# Altium PCB 车模底盘.PcbDoc (part 2 of 2)
Units mil, origin at the board's own origin, x right, y up, seen from the top; angles counter-clockwise.
Board outline 3926.98 x 3180.12 mil, 4 copper layers (Top Layer, GND, POWER, Bottom Layer); 159 components, 168 nets, 630 pads, 255 vias.
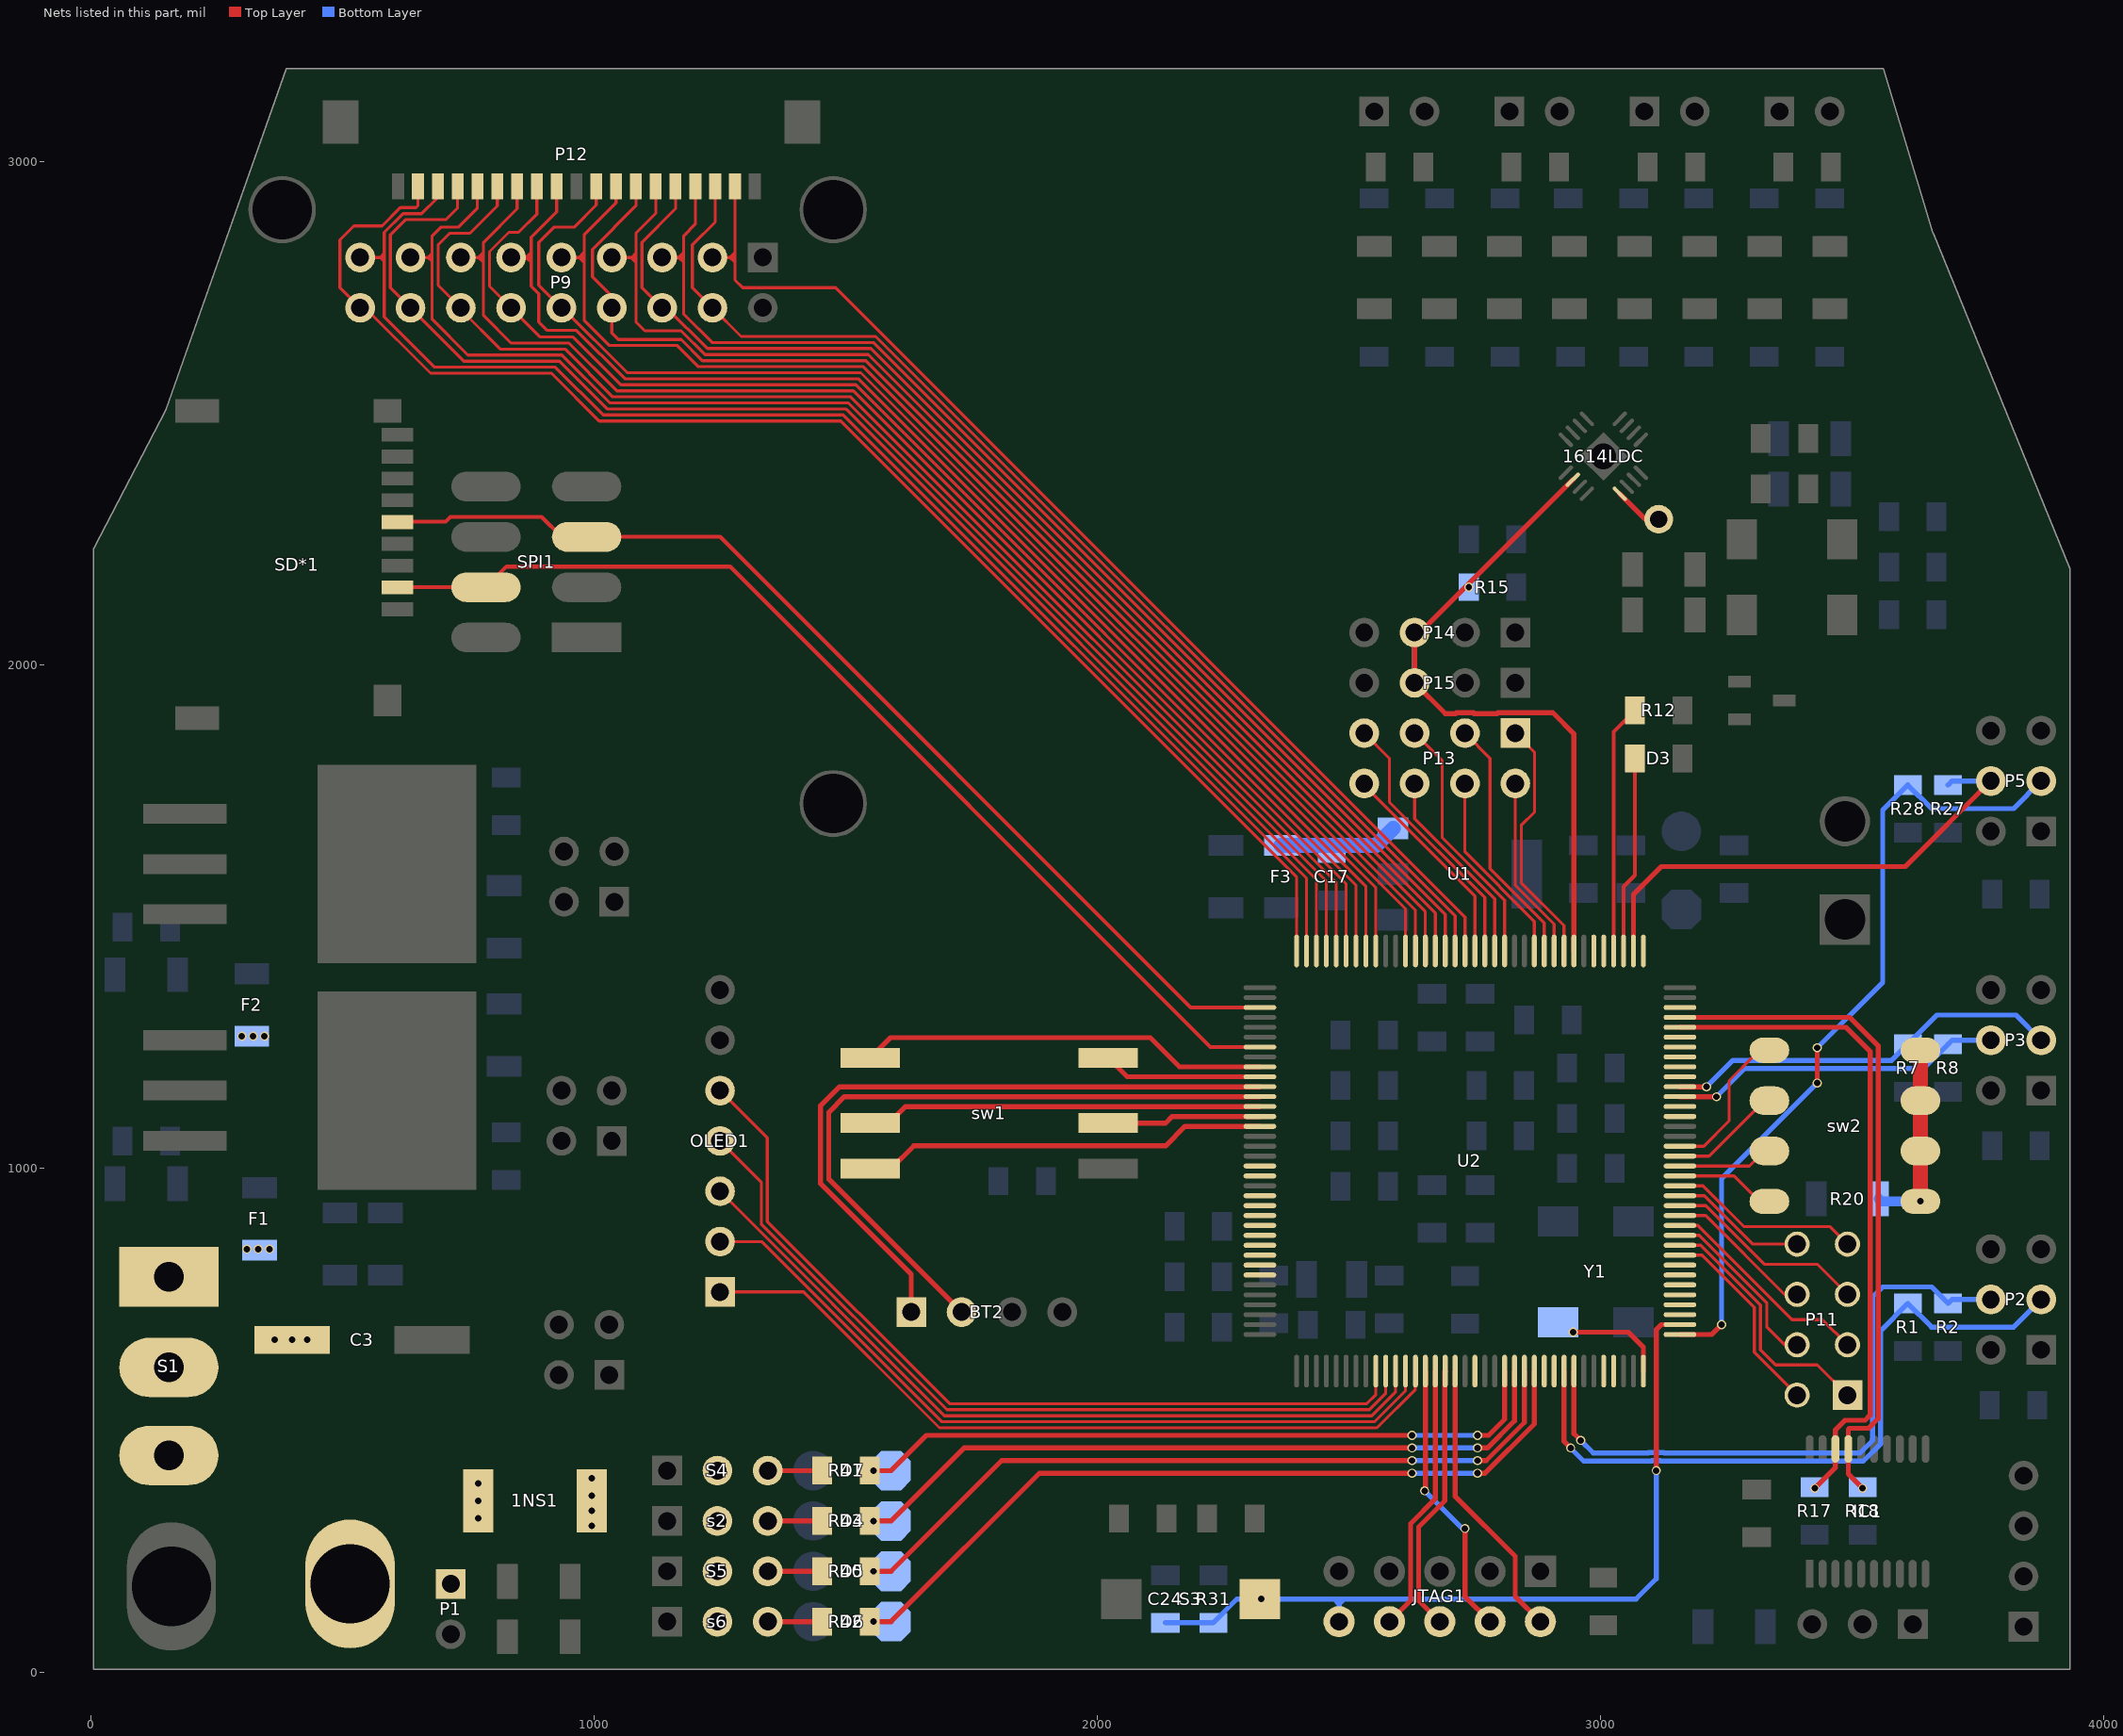
[diagram p4: the nets of this part, all layers, seen from the top]

## Via types
v1: diameter 18, hole 13, Top Layer to Bottom Layer, 253 vias
v2: diameter 39.37, hole 39.37, Top Layer to Bottom Layer, 2 vias

## Nets (pads, with @x,y where several pads share a name; then routed paths per layer and width w, separated by ;. In a path a pad name is that pad's centre, name@x,y a point inside that pad or via, vN(x,y) a via of type N, cw(c..) or ccw(c..) an arc to the next point about the centre after c; other vN are vias at no path point) (continued)
NetR20_2: R20.2 sw2.5 sw2.6 sw2.7 sw2.8 | length 385.1
  Top Layer w30: v1(3635,934.98) sw2.6@3635,1034.98 sw2.7@3635,1134.98 sw2.8@3635,1234.98
  Bottom Layer w20: R20.2@3552.01,939.98 3557.01,934.98 v1(3635,934.98)
NetR40_1: R40.1 S5.3 | length 107.8
  Top Layer w10: S5.3@1345,199.98 R40.1@1452.76,199.98
NetR41_1: R41.1 S4.3 | length 107.8
  Top Layer w10: S4.3@1345,399.98 R41.1@1452.76,399.98
NetR42_1: R42.1 s6.3 | length 107.8
  Top Layer w10: s6.3@1345,99.98 R42.1@1452.76,99.98
NetR43_1: R43.1 s2.3 | length 107.8
  Top Layer w10: s2.3@1345,299.98 R43.1@1452.76,299.98
OLEDCLK: OLED1.5 U2.45 | length 1712.1
  Top Layer w6: OLED1.5@1250,1154.98 1344,1060.98 1344,894.92 1705.94,532.98 2535.12,532.98 2552.99,550.86 U2.45@2552.99,597.66
OLEDCS: OLED1.1 U2.49 | length 1561.3
  Top Layer w6: OLED1.1@1250,754.98 1416.06,754.98 1686.06,484.98 2555,484.98 2631.73,561.71 U2.49@2631.73,597.66
OLEDDC: OLED1.2 U2.48 | length 1574.7
  Top Layer w6: OLED1.2@1250,854.98 1333.03,854.98 1691.03,496.98 2550.03,496.98 2612.05,559 U2.48@2612.05,597.66
OLEDMISO: OLED1.4 U2.46 | length 1650.1
  Top Layer w6: OLED1.4@1250,1054.98 1332,972.98 1332,889.95 1700.97,520.98 2540.09,520.98 2572.68,553.57 U2.46@2572.68,597.66
OLEDRST: OLED1.3 U2.47 | length 1588.1
  Top Layer w6: OLED1.3@1250,954.98 1696,508.98 2545.06,508.98 2592.36,556.28 U2.47@2592.36,597.66
PAD1: 1614LDC.5 pad.0@3115,2289.98 | length 98.2
  Top Layer w10: 1614LDC.5@3037.71,2340.51 3088.24,2289.98 pad.0@3115,2289.98
PCS0: SD*1.2 SPI1.6 U2.7 | length 2126.5
  Top Layer w8: SD*1.2@608.76,2154.49 609.25,2154.98 SPI1.6@785,2154.98 826,2195.98 1269.8,2195.98 2224.43,1241.36 U2.7@2322.68,1241.36
"PGA0 DM": U2.28
"PGA0 PM": U2.27
"PGA1 DM": U2.30
"PGA1 PM": U2.29
"PGA2 DM": U2.24
"PGA2 DP": U2.23
"PGA3 DM": U2.26
"PGA3 PM": U2.25
PTA5: U2.55
PTA6: D7.2 R41.2 U2.58 | length 1399.7
  Top Layer w6: R41.2@1547.24,399.98 v1(1555,399.98)
  Top Layer w10: v1(1555,399.98) 1590,399.98 1660,469.98 v1(2625,469.98) ; v1(2755,469.98) 2777.12,469.98 2808.9,501.76 U2.58@2808.9,597.66
  Bottom Layer w10: v1(2625,469.98) v1(2755,469.98)
PTA7: D4.2 R43.2 U2.59 | length 1462.5
  Top Layer w6: R43.2@1547.24,299.98 v1(1555,299.98)
  Top Layer w10: v1(1555,299.98) 1590,299.98 1735,444.98 v1(2625,444.98) ; v1(2755,444.98) 2774.75,444.98 2828.58,498.82 U2.59@2828.58,597.66
  Bottom Layer w10: v1(2625,444.98) v1(2755,444.98)
PTA8: D5.2 R40.2 U2.60 | length 1525.4
  Top Layer w6: R40.2@1547.24,199.98 v1(1555,199.98)
  Top Layer w10: v1(1555,199.98) 1590,199.98 1810,419.98 v1(2625,419.98) ; v1(2755,419.98) 2772.37,419.98 2848.27,495.88 U2.60@2848.27,597.66
  Bottom Layer w10: v1(2625,419.98) v1(2755,419.98)
PTA9: D6.2 R42.2 U2.61 | length 1588.2
  Top Layer w6: R42.2@1547.24,99.98 v1(1555,99.98)
  Top Layer w10: v1(1555,99.98) 1590,99.98 1885,394.98 v1(2625,394.98) ; v1(2755,394.98) 2770,394.98 2867.95,492.93 U2.61@2867.95,597.66
  Bottom Layer w10: v1(2625,394.98) v1(2755,394.98)
PTA10: U2.62
PTA11: U2.63
PTA12: P2.3 R1.1 U2.64 | length 1408.5
  Top Layer w10: U2.64@2927.01,597.66 2927.01,457.97 v1(2940,444.98)
  Bottom Layer w10: v1(2940,444.98) 2966,418.98 3100.72,418.98 3101.72,419.98 3118.28,419.98 3119.28,418.98 3521.63,418.98 3556,453.35 3556,678.23 R1.1@3610,732.23 3657.24,684.98 3820,684.98 P2.3@3875,739.98
PTA13: P2.4 R2.2 U2.65 | length 1289.8
  Top Layer w10: U2.65@2946.69,597.66 2946.69,473.29 v1(2960,459.98)
  Bottom Layer w10: v1(2960,459.98) 2985,434.98 3094.09,434.98 3095.09,435.98 3124.91,435.98 3125.91,434.98 3515,434.98 3540,459.98 3540,744.98 3560,764.98 3657.24,764.98 R2.2@3690,732.23 3697.76,739.98 P2.4@3775,739.98
PTA16: U2.68
PTA17: U2.69
PTA18: U2.72 Y1.3 | length 199.5
  Top Layer w10: v1(2945,674.98) 3055,674.98 3084.49,645.49 U2.72@3084.49,597.66
PTA19: P5.3 R28.2 U2.73 | length 1623.6
  Top Layer w10: U2.73@3157.32,670.49 3220.49,670.49 v1(3240,690) ; v1(3430,1170) v1(3430,1240)
  Bottom Layer w10: v1(3240,690) 3240,980 v1(3430,1170) ; v1(3430,1240) 3560,1370 3560,1712.23 R28.2@3610,1762.23 3657.24,1714.98 3820,1714.98 P5.3@3875,1769.98
PTA24: U2.75
PTA25: U2.76
PTA26: U2.77
PTA27: U2.78
PTA28: U2.79
PTA29: U2.80
PTB0: P11.2 U2.81 | length 400
  Top Layer w6: U2.81@3157.32,827.97 3201.1,827.97 3305,724.07 3305,634.98 P11.2@3390,549.98
PTB1: P11.1 U2.82 | length 508.2
  Top Layer w6: U2.82@3157.32,847.66 3198.38,847.66 3317,729.04 3317,639.95 3346.97,609.98 3430,609.98 P11.1@3490,549.98
PTB2: P11.4 U2.83 | length 350.8
  Top Layer w6: U2.83@3157.32,867.34 3195.67,867.34 3330,733.01 3330,684.98 3365,649.98 P11.4@3390,649.98
PTB3: P11.3 U2.84 | length 430.9
  Top Layer w6: U2.84@3157.32,887.03 3192.95,887.03 3380,699.98 3440,699.98 P11.3@3490,649.98
PTB4: P11.6 U2.85 | length 297.6
  Top Layer w6: U2.85@3157.32,906.71 3208.27,906.71 3365,749.98 P11.6@3390,749.98
PTB5: P11.5 U2.86 | length 405.8
  Top Layer w6: U2.86@3157.32,926.4 3208.58,926.4 3325,809.98 3430,809.98 P11.5@3490,749.98
PTB6: P11.8 U2.87 | length 272.5
  Top Layer w6: U2.87@3157.32,946.08 3205.87,946.08 3301.97,849.98 P11.8@3390,849.98
PTB7: P11.7 U2.88 | length 380.6
  Top Layer w6: U2.88@3157.32,965.77 3203.15,965.77 3283.94,884.98 3455,884.98 P11.7@3490,849.98
PTB8: sw2.4 U2.89 | length 188.6
  Top Layer w6: U2.89@3157.32,985.45 3264.53,985.45 3315,934.98 sw2.4@3315,924.98
PTB9: sw2.3 U2.90 | length 187.1
  Top Layer w6: U2.90@3157.32,1005.14 3295.16,1005.14 sw2.3@3330,1039.98
PTB10: sw2.2 U2.91 | length 220.4
  Top Layer w6: U2.91@3157.32,1024.82 3214.84,1024.82 sw2.2@3330,1139.98
PTB11: sw2.1 U2.92 | length 279.3
  Top Layer w6: U2.92@3157.32,1044.51 3204.53,1044.51 3255,1094.98 3255,1174.98 3305,1224.98 sw2.1@3315,1224.98
PTB16: U2.95
PTB17: U2.96
PTB18: P3.4 R8.1 U2.97 | length 664.3
  Top Layer w10: U2.97@3157.32,1142.93 3157.64,1142.62 v1(3230,1142.62)
  Bottom Layer w10: v1(3230,1142.62) 3286.36,1198.98 3641.76,1198.98 R8.1@3690,1247.23 3697.76,1254.98 P3.4@3775,1254.98
PTB19: P3.3 R7.2 U2.98 | length 797.4
  Top Layer w10: U2.98@3157.32,1162.62 v1(3210,1162.62)
  Bottom Layer w10: v1(3210,1162.62) 3262.36,1214.98 3577.76,1214.98 R7.2@3610,1247.23 3667.76,1304.98 3825,1304.98 P3.3@3875,1254.98
PTB20: U2.99
PTB21: U2.100
PTB22: U2.101
PTB23: U2.102
PTC0: U2.103
PTC1: IC1.18 R17.1 U2.104 | length 1334.5
  Top Layer w10: U2.104@3157.32,1280.73 3487.38,1280.73 3535,1233.11 3535,509.98 3525,499.98 3485,499.98 3466.18,481.16 IC1.18@3466.18,443.01 3466.18,406.18 v1(3425,365)
PTC2: IC1.17 R18.1 U2.105 | length 1354.3
  Top Layer w10: U2.105@3157.32,1300.41 3494.57,1300.41 3551,1243.98 3551,503.35 3531.63,483.98 3494,483.98 3491.77,481.75 IC1.17@3491.77,443.01 3491.77,393.23 v1(3520,365)
PTC3: U2.106
PTC4: U2.109
PTC5: P5.4 R27.1 U2.110 | length 1004.2
  Top Layer w10: U2.110@3064.8,1432.3 3064.8,1544.78 3120,1599.98 3605,1599.98 P5.4@3775,1769.98
  Bottom Layer w10: R27.1@3690,1762.23 3697.76,1769.98 P5.4@3775,1769.98
PTC6: D3.2 U2.111 | length 392.1
  Top Layer w8: U2.111@3045.12,1432.3 3045.12,1560.12 3067.76,1582.76 D3.2@3067.76,1814.98
PTC7: R12.2 U2.112 | length 495.2
  Top Layer w8: U2.112@3025.43,1432.3 3025.43,1867.68 R12.2@3067.76,1910
PTC8: U2.113
PTC9: U2.114
PTC11: 1614LDC.2 P14.3 P15.3 R15.1 U2.116 | length 1432.4
  Top Layer w10: 1614LDC.2@2944.45,2368.35 2641.08,2064.98 P14.3@2630,2064.98 P15.3@2630,1964.98 2691,1903.98 2711.69,1903.98 2713.21,1905.51 2746.79,1905.51 2748.31,1903.98 2794.39,1903.98 2795.92,1905.51 2904.47,1905.51 2946.69,1863.29 U2.116@2946.69,1432.3
  Bottom Layer w10: P15.3@2630,1964.98 P14.3@2630,2064.98
  other v1: 2737.76,2154.98
PTC12: P13.1 U2.117 | length 494.8
  Top Layer w6: P13.1@2830,1864.98 2868.53,1826.45 2868.53,1708.51 2842,1681.98 2842,1567.98 2927.01,1482.97 U2.117@2927.01,1432.3
PTC13: P13.2 U2.118 | length 364.7
  Top Layer w6: P13.2@2830,1764.98 2830,1563.01 2907.32,1485.69 U2.118@2907.32,1432.3
PTC14: P13.3 U2.119 | length 498
  Top Layer w6: P13.3@2730,1864.98 2780,1814.98 2780,1596.04 2887.64,1488.4 U2.119@2887.64,1432.3
PTC15: P13.4 U2.120 | length 389.8
  Top Layer w6: P13.4@2730,1764.98 2730,1629.07 2867.95,1491.12 U2.120@2867.95,1432.3
PTC16: P13.5 U2.123 | length 506.8
  Top Layer w6: P13.5@2630,1864.98 2685,1809.98 2685,1657.1 2808.9,1533.2 U2.123@2808.9,1432.3
PTC17: P13.6 U2.124 | length 398.6
  Top Layer w6: P13.6@2630,1764.98 2630,1694.98 2789.21,1535.77 U2.124@2789.21,1432.3
PTC18: P13.7 U2.125 | length 531.9
  Top Layer w6: P13.7@2530,1864.98 2580,1814.98 2580,1728.01 2769.53,1538.48 U2.125@2769.53,1432.3
PTC19: P13.8 U2.126 | length 423.7
  Top Layer w6: P13.8@2530,1764.98 2530,1761.04 2749.84,1541.2 U2.126@2749.84,1432.3
PTD0: P9.3 P12.2 U2.127 | length 2300.5
  Top Layer w6: P9.3@1235,2809.98 1270,2809.98 ; 1279.8,2819.98 1279.8,2819.78 ; P12.2@1279.8,2951 1279.8,2819.78 ; U2.127@2730.16,1432.3 2730.16,1499.38 1479.56,2749.98 1295,2749.98 1279.8,2765.18 1279.8,2799.98 ; 1270,2809.98 1279.8,2819.78 ; 1270,2809.98 1270,2809.78 1279.8,2799.98 ; 1270,2809.98 1279.8,2809.98 ; 1279.8,2799.98 1279.8,2809.98 ; 1279.8,2809.98 1279.8,2819.78
PTD1: P9.4 P12.3 U2.128 | length 2322
  Top Layer w6: P12.3@1240.43,2951 1240.43,2880.41 1195,2834.98 1195,2749.98 P9.4@1235,2709.98 1292,2652.98 1559.59,2652.98 2710.47,1502.1 U2.128@2710.47,1432.3
PTD2: P9.5 P12.4 U2.129 | length 2414
  Top Layer w6: P9.5@1135,2809.98 1168,2809.98 ; P12.4@1201.06,2951 1201.06,2876.04 1178,2852.98 1178,2819.98 ; U2.129@2690.79,1432.3 2690.79,1504.81 1554.62,2640.98 1234,2640.98 1178,2696.98 1178,2799.98 ; 1168,2809.98 1178,2819.98 ; 1168,2809.98 1178,2809.98 ; 1168,2809.98 1178,2799.98 ; 1178,2799.98 1178,2809.98 ; 1178,2809.98 1178,2819.98
PTD3: P9.6 P12.5 U2.130 | length 2394.6
  Top Layer w6: P12.5@1161.69,2951 1161.69,2906.67 1095,2839.98 1095,2749.98 P9.6@1135,2709.98 1143.94,2709.98 1224.94,2628.98 1549.65,2628.98 2671.1,1507.52 U2.130@2671.1,1432.3
PTD4: P9.7 P12.6 U2.131 | length 2491.6
  Top Layer w6: P9.7@1035,2809.98 1075,2809.98 ; 1083,2819.98 1083,2817.98 ; P12.6@1122.32,2951 1122.32,2897.3 1083,2857.98 1083,2817.98 ; U2.131@2651.42,1432.3 2651.42,1510.24 1544.68,2616.98 1219.97,2616.98 1172.72,2664.23 1100.75,2664.23 1083,2681.98 1083,2799.98 ; 1075,2809.98 1083,2817.98 ; 1075,2809.98 1083,2809.98 ; 1075,2809.98 1075,2807.98 1083,2799.98 ; 1083,2799.98 1083,2809.98 ; 1083,2809.98 1083,2817.98
PTD5: P9.8 P12.7 U2.132 | length 2495.3
  Top Layer w6: P12.7@1082.95,2951 1082.95,2912.42 996.47,2825.94 996.47,2771.45 1035,2732.93 P9.8@1035,2709.98 1035,2659.98 1048,2646.98 1173,2646.98 1215,2604.98 1539.7,2604.98 2631.73,1512.95 U2.132@2631.73,1432.3
PTD6: P9.9 P12.8 U2.133 | length 2565.4
  Top Layer w6: P9.9@935,2809.98 970,2809.98 ; P12.8@1043.58,2951 1043.58,2918.56 980,2854.98 980,2819.98 ; U2.133@2612.05,1432.3 2612.05,1515.67 1534.73,2592.98 1207,2592.98 1165,2634.98 1030,2634.98 980,2684.98 980,2799.98 ; 970,2809.98 980,2819.98 ; 970,2809.98 980,2809.98 ; 970,2809.98 980,2799.98 ; 980,2799.98 980,2809.98 ; 980,2809.98 980,2819.98
PTD7: P9.10 P12.9 U2.136 | length 2551.1
  Top Layer w6: P12.9@1004.21,2951 1004.21,2914.19 960,2869.98 920,2869.98 890,2839.98 890,2754.98 P9.10@935,2709.98 936.97,2709.98 1065.97,2580.98 1529.76,2580.98 2552.99,1557.75 U2.136@2552.99,1432.3
PTD8: P9.11 P12.11 U2.137 | length 2600.5
  Top Layer w6: P9.11@835,2809.98 865,2809.98 ; P12.11@925.47,2951 925.47,2900.45 875,2849.98 875,2819.98 ; U2.137@2533.31,1432.3 2533.31,1560.47 1524.79,2568.98 1061,2568.98 965,2664.98 906.97,2664.98 890,2681.95 890,2738.01 875,2753.01 875,2799.98 ; 865,2809.98 875,2819.98 ; 865,2809.98 875,2799.98 ; 865,2809.98 875,2809.98 ; 875,2799.98 875,2809.98 ; 875,2809.98 875,2819.98
PTD9: P9.12 P12.12 U2.138 | length 2593.7
  Top Layer w6: P12.12@886.1,2951 886.1,2896.08 850,2859.98 830.51,2859.98 792,2821.47 792,2752.98 P9.12@835,2709.98 893,2651.98 958,2651.98 1053,2556.98 1519.82,2556.98 2513.62,1563.18 U2.138@2513.62,1432.3
PTD10: P9.13 P12.13 U2.139 | length 2672.2
  Top Layer w6: P9.13@735,2809.98 770,2809.98 ; P12.13@846.73,2951 846.73,2906.71 780,2839.98 780,2819.98 ; U2.139@2493.94,1432.3 2493.94,1565.9 1514.85,2544.98 1045,2544.98 950,2639.98 835,2639.98 780,2694.98 780,2799.98 ; 770,2809.98 780,2819.98 ; 770,2809.98 780,2799.98 ; 770,2809.98 780,2809.98 ; 780,2799.98 780,2809.98 ; 780,2809.98 780,2819.98
PTD11: P9.14 P12.14 U2.140 | length 2682.2
  Top Layer w6: P12.14@807.36,2951 807.36,2912.34 753,2857.98 713,2857.98 690,2834.98 690,2754.98 P9.14@735,2709.98 735,2706.34 813.36,2627.98 942,2627.98 1037,2532.98 1509.88,2532.98 2474.25,1568.61 U2.140@2474.25,1432.3
PTD12: P9.15 P12.15 U2.141 | length 2767.1
  Top Layer w6: P9.15@635,2809.98 670,2809.98 ; 678,2819.98 678,2817.98 ; P12.15@767.99,2951 767.99,2907.97 730,2869.98 695,2869.98 678,2852.98 678,2817.98 ; U2.141@2454.57,1432.3 2454.57,1571.33 1504.91,2520.98 1030.97,2520.98 935.97,2615.98 749,2615.98 678,2686.98 678,2801.98 ; 670,2809.98 678,2817.98 ; 670,2809.98 678,2809.98 ; 670,2809.98 678,2801.98 ; 678,2801.98 678,2809.98 ; 678,2809.98 678,2817.98
PTD13: P9.16 P12.16 U2.142 | length 2771.9
  Top Layer w6: P12.16@728.62,2951 728.62,2908.6 705,2884.98 625,2884.98 595,2854.98 595,2749.98 P9.16@635,2709.98 741,2603.98 931,2603.98 1026,2508.98 1499.94,2508.98 2434.88,1574.04 U2.142@2434.88,1432.3
PTD14: P9.17 P12.17 U2.143 | length 2835.6
  Top Layer w6: P9.17@535,2809.98 575,2809.98 ; 583,2819.71 583,2817.98 ; P12.17@689.25,2951 689.25,2929.23 657,2896.98 620.03,2896.98 583,2859.95 583,2817.98 ; U2.143@2415.2,1432.3 2415.2,1576.75 1494.97,2496.98 1018,2496.98 923,2591.98 683,2591.98 583,2691.98 583,2801.98 ; 575,2809.98 583,2817.98 ; 575,2809.98 583,2809.98 ; 575,2809.98 583,2801.98 ; 583,2801.98 583,2809.98 ; 583,2809.98 583,2817.98
PTD15: P9.18 P12.18 U2.144 | length 2848.4
  Top Layer w6: P12.18@649.88,2951 649.88,2913.29 645.57,2908.98 615.06,2908.98 578.59,2872.51 522.53,2872.51 495,2844.98 495,2749.98 P9.18@535,2709.98 545,2709.98 675,2579.98 915,2579.98 1010,2484.98 1490,2484.98 2395.51,1579.47 U2.144@2395.51,1432.3
PTE2: SD*1.5 SPI1.3 U2.3 | length 2121.7
  Top Layer w8: SD*1.5@608.76,2284.41 609.33,2284.98 705,2284.98 714.53,2294.51 895.47,2294.51 935,2254.98 SPI1.3@985,2254.98 1250.4,2254.98 2185.28,1320.1 U2.3@2322.68,1320.1
PTE6: sw1.1 U2.9 | length 814.4
  Top Layer w10: sw1.1@1548.78,1220.22 1588.54,1259.98 2105,1259.98 2162.99,1201.99 U2.9@2322.68,1201.99
PTE7: sw1.6 U2.10 | length 317.2
  Top Layer w10: sw1.6@2021.22,1220.22 2059.13,1182.3 U2.10@2322.68,1182.3
PTE8: BT2.1 U2.11 | length 1372.8
  Top Layer w10: BT2.1@1630,714.98 1630,789.98 1450,969.98 1450,1124.98 1487.64,1162.62 U2.11@2322.68,1162.62
PTE9: BT2.2 U2.12 | length 1375.6
  Top Layer w10: BT2.2@1730,714.98 1466,978.98 1466,1111.61 1497.33,1142.93 U2.12@2322.68,1142.93
PTE10: sw1.2 U2.13 | length 787.5
  Top Layer w10: sw1.2@1548.78,1090.3 1585.32,1090.3 1618.27,1123.25 U2.13@2322.68,1123.25
PTE11: sw1.5 U2.14 | length 307
  Top Layer w10: sw1.5@2021.22,1090.3 2135.32,1090.3 2148.58,1103.56 U2.14@2322.68,1103.56
PTE12: sw1.3 U2.15 | length 808.7
  Top Layer w10: sw1.3@1548.78,999.74 1589.76,999.74 1635,1044.98 2135,1044.98 2173.9,1083.88 U2.15@2322.68,1083.88
RESET: C24.2 JTAG1.10 R31.1 S3.2 U2.74 | length 1631
  Top Layer w10: v1(3110,399.98) 3110,679.98 3120.2,690.18 U2.74@3157.32,690.18
  Bottom Layer w10: C24.2@2135,97.74 R31.1@2230,97.74 2277.24,144.98 v1(2325,144.98) 2470,144.98 ; JTAG1.10@2480,99.98 2480,134.98 ; v1(3110,399.98) 3110,184.98 3070,144.98 2490,144.98 ; 2470,144.98 2480,134.98 ; 2470,144.98 2480,144.98 ; 2480,134.98 2490,144.98 ; 2480,134.98 2480,144.98 ; 2480,144.98 2490,144.98
TCK: JTAG1.4 U2.50 | length 555
  Top Layer w10: v1(2650,359.98) 2651.42,361.4 U2.50@2651.42,597.66 ; v1(2730,284.98) 2730,149.98 JTAG1.4@2780,99.98
  Bottom Layer w10: v1(2650,359.98) 2725,284.98 v1(2730,284.98)
TDI: JTAG1.8 U2.51 | length 535.4
  Top Layer w10: JTAG1.8@2580,99.98 2622,141.98 2622,294.61 2671.1,343.71 U2.51@2671.1,597.66
TDO: JTAG1.6 U2.52 | length 536.9
  Top Layer w10: JTAG1.6@2680,99.98 2638,141.98 2638,287.98 2690,339.98 2690,596.87 U2.52@2690.79,597.66
TMS: JTAG1.2 U2.53 | length 567.9
  Top Layer w10: U2.53@2710.47,597.66 2710.47,349.51 2830,229.98 2830,149.98 JTAG1.2@2880,99.98
USB0_DM: U2.20
USB0_DP: U2.19
VBAT: pad.0@515,174.98 S1.2
VCC: 1NS1.A C3.1 F1.1 F2.1 P1.1 S1.0 S1.1
  other v1: 770,305 769.88,339.98 770,375 365,660 400,660 430,660 310,840 332.5,840 355,840 300,1262.97 322.5,1262.97 345,1262.97
VCCA: C17.2 F3.1 U1.3 | length 236
  Bottom Layer w30: F3.1@2365,1641.99 2553.58,1641.99 U1.3@2587.13,1675.53
VREGIN: U2.22
VST: 1NS1.K s2.2 S4.2 S5.2 s6.2
  other v1: 995,290 995,320 995,350 995,385
pads on no net: P2.5 P2.6 P3.5 P3.6 P5.5 P5.6 P12.20 P12.21 SD*1.10 SD*1.11 SD*1.12 SD*1.13 Y1.1 Y3.1
copper on no net:
  other v2: 195.38,2079.69 195.38,2394.65

## Polygon pours and split planes (outlines as drawn)
EGND on GND (split plane): 854.91,25.1 25.11,25.09 25.11,819.91 854.91,819.91
GND on GND (split plane): 3640.97,2852.7 3641.1,2852.38 3641.14,2852.23 3641.48,2851.4 3641.74,2850.51 3911.9,2187.41 3911.9,25.11 875.09,25.1 875.09,830 874.74,832.61 873.74,835.04 872.13,837.13 870.04,838.73 867.61,839.74 865,840.09 25.11,840.09 25.11,2225.96 167.26,2498.36 167.35,2498.57 167.36,2498.59 168.1,2500.39 168.68,2501.62 402.77,3164.87 3546.37,3164.87
3.3V on POWER (split plane): 3640.97,2852.7 3641.1,2852.38 3641.14,2852.23 3641.48,2851.4 3641.74,2850.51 3911.9,2187.41 3911.9,2035.09 2365.09,2035.09 2365.09,2315 2364.81,2317.06 2365.1,2317.74 2365.44,2320.36 2365.44,2321.21 2365.83,2321.21 2365.44,2322.16 2365.44,3164.87 3546.37,3164.87
K3.3V on POWER (split plane): 3253.61,1859.63 3259.92,1858.56 3266.06,1856.79 3271.98,1854.34 3277.58,1851.24 3282.8,1847.54 3287.26,1843.55 3287.51,1843.22 3287.85,1842.97 3293.46,1836.89 3298.84,1830.07 3303.67,1822.84 3307.92,1815.25 3311.56,1807.36 3314.57,1799.21 3316.93,1790.84 3318.62,1782.32 3319.64,1773.69 3319.97,1765.42 3319.91,1765 3319.91,510 3319.97,509.58 3319.64,501.31 3318.62,492.68 3316.93,484.16 3314.57,475.79 3311.56,467.64 3307.92,459.75 3303.67,452.16 3298.84,444.93 3293.46,438.11 3287.85,432.03 3287.51,431.78 3032.62,176.88 3032.36,176.54 3027.25,171.92 3021.38,167.56 3015.11,163.81 3008.51,160.68 3001.62,158.22 2994.53,156.44 2987.3,155.37 2980.42,155.03 2980,155.09 2170.58,155.09 2168.69,155.87 2168.69,155.25 2168.13,155.32 2166.96,155.17 2166.95,155.25 2164.14,155.03 2160.37,155.32 2156.69,156.21 2153.19,157.65 2149.97,159.63 2147.31,161.9 2147.13,162.13 2146.8,162.39 2141.25,168.39 2135.92,175.15 2131.15,182.29 2126.95,189.79 2123.35,197.6 2120.37,205.67 2118.04,213.94 2116.36,222.37 2115.35,230.91 2115.03,239.08 2115.09,239.5 2115.09,1424.91 2315,1424.91 2317.61,1425.26 2320.04,1426.27 2322.13,1427.87 2323.73,1429.96 2324.74,1432.39 2325.09,1435 2325.09,1859.91 3247.22,1859.91 3247.62,1859.97
5V on POWER (split plane): 163 vertices, not listed, extent 525.04,25.1 3911.9,2000.17
VST on POWER (split plane): 1284.91,25.1 890.09,25.1 890.09,444.91 1284.91,444.91
3.3V on POWER (split plane): 2345.27,2323.85 2345.26,2323.82 2344.91,2321.21 2344.9,2321.21 2345.29,2318.29 2345.41,2317.99 2345.26,2317.61 2344.91,2315 2344.91,2010.26 2345.26,2007.65 2346.27,2005.21 2347.87,2003.13 2349.96,2001.52 2352.39,2000.51 2355,2000.17 3694.91,2000.17 3694.91,395.36 3694.97,394.93 3694.63,387.97 3693.54,380.66 3691.75,373.48 3689.26,366.52 3686.09,359.84 3682.29,353.5 3677.89,347.56 3673.21,342.39 3672.87,342.13 3672.61,341.79 3666.98,336.63 3660.58,331.72 3653.78,327.39 3646.63,323.67 3639.18,320.59 3631.49,318.16 3623.62,316.42 3615.63,315.36 3608,315.03 3607.57,315.09 3199.35,315.09 3301.78,417.51 3301.8,417.54 3308.14,424.35 3314,431.62 3319.32,439.29 3324.08,447.32 3328.26,455.67 3331.84,464.29 3334.79,473.15 3337.09,482.2 3338.75,491.39 3339.75,500.67 3340.08,509.97 3340.09,510 3340.09,1765 3340.08,1765.03 3339.75,1774.33 3338.75,1783.61 3337.09,1792.8 3334.79,1801.85 3331.84,1810.71 3328.26,1819.33 3324.08,1827.68 3319.32,1835.71 3314,1843.38 3308.14,1850.65 3301.8,1857.46 3301.78,1857.49 3296.17,1862.58 3290.09,1867.09 3283.59,1870.98 3276.75,1874.22 3269.62,1876.77 3262.27,1878.61 3254.78,1879.72 3247.22,1880.09 1405,1880.09 1404.97,1880.08 1395.67,1879.75 1386.39,1878.75 1377.2,1877.09 1368.15,1874.79 1359.29,1871.84 1350.67,1868.26 1342.32,1864.08 1334.29,1859.32 1326.62,1854 1319.35,1848.14 1312.54,1841.8 1312.51,1841.78 1306.96,1835.72 1301.95,1829.2 1297.53,1822.26 1293.74,1814.97 1290.59,1807.38 1288.12,1799.54 1286.34,1791.51 1285.27,1783.36 1284.91,1775.15 1284.91,1404.18 1272.87,1392.13 1272.61,1391.8 1266.61,1386.25 1259.85,1380.92 1252.71,1376.15 1245.21,1371.95 1237.4,1368.35 1229.33,1365.37 1221.06,1363.04 1212.63,1361.36 1204.09,1360.35 1195.92,1360.03 1195.5,1360.09 25.11,1360.09 25.11,2225.96 167.26,2498.36 167.35,2498.57 167.36,2498.59 168.1,2500.39 168.68,2501.62 402.77,3164.87 2345.27,3164.87
VCC on POWER (split plane): 504.91,1315.86 504.91,1305 504.91,1240 504.91,950 504.91,826.21 504.9,826.21 505.29,819.35 506.44,812.57 508.34,805.96 510.98,799.61 514.3,793.59 518.28,787.99 522.86,782.86 529,777.24 535.61,772.17 542.63,767.7 550.02,763.85 557.71,760.67 565.65,758.16 573.78,756.36 582.04,755.27 590.36,754.91 815,754.91 815.36,754.96 820.22,754.64 825.35,753.62 830.3,751.94 834.99,749.63 839.34,746.72 843.27,743.27 846.72,739.34 849.63,734.99 851.94,730.3 853.62,725.35 854.64,720.22 854.96,715.36 854.91,715 854.91,645 854.91,25.1 640.09,25.1 640.09,40 640.09,76.72 640.09,345 640.08,345.03 639.75,354.33 638.75,363.61 637.09,372.8 634.79,381.85 631.84,390.71 628.26,399.33 624.08,407.68 619.32,415.71 614,423.38 608.14,430.65 601.8,437.46 601.78,437.49 547.49,491.78 547.46,491.8 540.65,498.14 533.38,504 525.71,509.32 517.68,514.08 509.33,518.26 500.71,521.84 491.85,524.79 482.8,527.09 473.61,528.75 464.33,529.75 455.03,530.08 455,530.09 25.11,530.09 25.11,1339.91 504.91,1339.91
VBAT on POWER (split plane): 463.69,509.64 472.32,508.62 480.84,506.93 489.21,504.57 497.36,501.56 505.25,497.92 512.84,493.67 520.07,488.84 526.89,483.46 532.97,477.85 533.22,477.51 587.51,423.22 587.85,422.97 593.46,416.89 598.84,410.07 603.67,402.84 607.92,395.25 611.56,387.36 614.57,379.21 616.93,370.84 618.62,362.32 619.64,353.69 619.97,345.42 619.91,345 619.91,76.72 619.91,40 619.91,25.1 25.11,25.09 25.11,509.91 455,509.91 455.42,509.97

## Keep-outs
Keep-Out Layer:
  lines w10: 0,2234.98 0,0 3937.01,0 3937.01,2195 ; 1.5,2234.98 145,2509.98 385,3189.98 3560,3189.98 ; 2355,2050 2355,2100 ; 2355,2150 2355,2200 ; 2355,2250 2355,2300 ; 2355,2350 2355,2400 ; 2355,2450 2355,2500 ; 2355,2550 2355,2600 ; 2355,2650 2355,2700 ; 2355,2750 2355,2800 ; 2355,2850 2355,2900 ; 2355,2975 2355,3025 ; 2355,3075 2355,3125 ; 2380.02,2014.98 2480,2014.98 ; 2565,2014.98 2590,2014.98 ; 2665,2014.98 2695,2014.98 ; 2760,2014.98 2790,2014.98 ; 2895,2014.98 2945,2014.98 ; 2995,2014.98 3045,2014.98 ; 3095,2014.98 3145,2014.98 ; 3195,2014.98 3245,2014.98 ; 3295,2014.98 3345,2014.98 ; 3395,2014.98 3445,2014.98 ; 3495,2014.98 3545,2014.98 ; 3565,3189.98 3665,2859.98 3936.07,2194.62 ; 3595,2014.98 3645,2014.98 ; 3695,2014.98 3745,2014.98 ; 3795,2014.98 3845,2014.98 ; 3895,2014.98 3938.5,2014.98

## Other copper
Top Layer:
  text "武汉理工大学" at 2414.8,2465.75 h50
  text "晨风" at 2563.53,2427.8 h39.37
  text "2016" at 2415.79,2424.41 h50
  text "张艳松" at 2415.79,2384.06 h50
  text "袁佳威" at 2413.82,2340.75 h50
  text "李锐戈" at 2414.8,2291.54 h50
  text "武汉理工大学" at 1404.8,1540.75 h50
  text "晨风" at 1553.53,1502.8 h39.37
  text "2016" at 1405.79,1499.41 h50
  text "张艳松" at 1405.79,1459.06 h50
  text "袁佳威" at 1403.82,1415.75 h50
  text "李锐戈" at 1404.8,1366.54 h50
GND (plane layer: these items are gaps in the copper):
  lines w20: -5.02,830 865,830 865,-5.03 860,-5.03
POWER (plane layer: these items are gaps in the copper):
  lines w20: 0,350 0,505 0,557.93 cw(c17.07,557.93) 5,570 ; 0,520 48.28,520 385,520 455,520 cw(c455,399.29) 540.36,484.64 594.64,430.36 cw(c509.29,345) 630,345 630,76.72 630,40 630,17.07 cw(c612.93,17.07) 625,5 cw(c612.89,17.11) 612.89,-0.02 589.98,-0.02 410.02,-0.02 386.26,-0.02 ; 0,2275 ccw(c36.21,2238.79) -15,2238.79 -15,1350 470,1350 480.86,1350 1195.5,1350 ccw(c1195.5,1469.5) 1280,1385 1295,1400 1295,1775.15 cw(c1379.14,1775.15) 1319.64,1834.64 cw(c1405,1749.29) 1405,1870 3247.22,1870 cw(c3247.22,1802.93) 3294.64,1850.36 cw(c3209.29,1765) 3330,1765 3330,510 cw(c3209.29,510) 3294.64,424.64 3039.75,169.75 cw(c2980,229.5) 2980,145 2220,145 2168.69,145 cw(c2168.69,145.8) 2168.13,145.23 cw(c2164.14,179.14) 2140,155 cw(c2224.5,239.5) 2105,239.5 2105,1435 2315,1435 2315,1870 ; 5,1340 ccw(c17.07,1327.93) 0,1327.93 0,1305 0,620 ccw(c24.14,620) 7.07,602.93 15,595 ; 381.5,3190 2354.98,3190 2355.36,3189.63 2355.36,3166.66 2355.36,2320.36 cw(c2356.21,2321.21) 2355,2321.21 ; 515,1240 515,1315.86 ; 515,1350 515,1315.86 ; 865,-5.03 865,645 865,715 ccw(c815,715) 815,765 690,765 590.36,765 cw(c590.36,850.36) 530,790 cw(c566.21,826.21) 515,826.21 515,950 515,1305 515,1315.86 ; 880,5 880,455 1295,455 1295,-5.03 ; 2355,2025 3941.74,2025 3945,2200 3560,3189.98 3487.13,3189.98 2355.36,3189.98 ; 2355,2315 2355,2010.26 3704.38,2010.26 ; 3175,305 3282.43,305 3607.57,305 ccw(c3607.57,407.43) 3680,335 ccw(c3619.64,395.36) 3705,395.36 3705,2009.64 3704.38,2010.26 ; 3705,2010 ccw(c3704.38,2009.38) 3704.38,2010.26 ; 3941.77,2010.26 3704.38,2010.26

## Silkscreen, mask and mechanical layers (free items; w line width, h text height)
Top Overlay:
  lines w5: 3925,705 3915,705 3915,775 3925,775 ; 3925,1220 3915,1220 3915,1290 3925,1290 ; 3925,1740 3910,1740 3910,1805 3925,1805
  text "C" at 2595,2980 h39.37
  text "C" at 2860,2980 h39.37
  text "C" at 3130,2980 h39.37
  text "C" at 3395,2975 h39.37
  text "5V" at 1435,2795 h39.37 r90
  text "0R" at 2530,2765 h39.37
  text "0R" at 2660,2760 h39.37
  text "0R" at 2790,2760 h39.37
  text "0R" at 2920,2760 h39.37
  text "0R" at 3050,2760 h39.37
  text "0R" at 3180,2760 h39.37
  text "0R" at 3310,2760 h39.37
  text "0R" at 3440,2760 h39.37
  text "GND" at 1435,2675 h39.37 r90
  text "C" at 3360,2435 h39.37
  text "C" at 3360,2335 h39.37
  text "1.5K" at 3080,1965 h39.37
  text "LED_W" at 3220,1800 h39.37
  text "3.3V" at 915,1690 h39.37
  text "5V" at 3760,1500 h39.37
  text "GND" at 3845,1500 h39.37
  text "GND" at 1345,1325 h39.37 r90
  text "E6" at 1530,1255 h39.37
  text "E7" at 2005,1255 h39.37
  text "5V" at 915,1215 h39.37
  text "B11" at 3225,1215 h39.37
  text "3.3V" at 1345,1210 h39.37 r90
  text "E11" at 2000,1130 h39.37
  text "E10" at 1520,1125 h39.37
  text "B10" at 3225,1095 h39.37
  text "E12" at 1520,1035 h39.37
  text "B9" at 3235,1020 h39.37
  text "5V" at 3760,1000 h39.37
  text "GND" at 3845,1000 h39.37
  text "B8" at 3235,925 h39.37
  text "E8" at 1615,775 h39.37
  text "E9" at 1715,775 h39.37
  text "GND" at 1805,775 h39.37
  text "5V" at 1915,775 h39.37
  text "GND" at 910,750 h39.37
  text "GND" at 3845,490 h39.37
  text "5V" at 3755,485 h39.37
  text "GND" at 1120,465 h39.37
  text "7.5V" at 1215,465 h39.37
  text "220R" at 1465,455 h39.37
  text "A6" at 1580,390 h39.37
  text "FTM0" at 1395,380 h39.37 r270
  text "LED_B" at 2125,365 h39.37
  text "5V" at 3775,365 h39.37 r90
  text "GND" at 135,325 h39.37
  text "VCC" at 485,325 h39.37
  text "D" at 870,325 h39.37
  text "A7" at 1580,285 h39.37
  text "104" at 3245,285 h39.37 r90
  text "GND" at 3775,265 h39.37 r90
  text "A8" at 1580,190 h39.37
  text "FTM1" at 1395,180 h39.37 r270
  text "0R" at 1020,160 h39.37 r90
  text "VCC" at 795,145 h39.37 r90
  text "104" at 3090,115 h39.37 r90
  text "A9" at 1580,85 h39.37
  text "0R" at 1020,55 h39.37 r90
  text "GND" at 795,40 h39.37 r90
  text "GND" at 3390,5 h39.37
Bottom Overlay:
  text "18pF" at 3540,2920 h39.37 r90
  text "18pF" at 2495,2910 h39.37 r90
  text "18pF" at 2475,2690 h39.37 r90
  text "18pF" at 3540,2690 h39.37 r90
  text "0R" at 3545,2470 h39.37 r90
  text "0R" at 3545,2365 h39.37 r90
  text "10uH" at 3740,2325 h39.37 r90
  text "10K" at 2690,2270 h39.37 r90
  text "104" at 3740,2225 h39.37 r90
  text "10K" at 2690,2185 h39.37 r90
  text "103" at 3740,2125 h39.37 r90
  text "0R 二选一" at 2985,2055 h39.37 r270
  text "4.7K" at 3640,1810 h39.37
  text "4.7K" at 3730,1810 h39.37
  text "1K" at 3270,1800 h39.37
  text "C" at 830,1715 h39.37
  text "C" at 2985,1600 h39.37 r90
  text "C" at 3070,1600 h39.37 r90
  text "F" at 2375,1590 h39.37 r90
  text "D" at 2265,1585 h39.37 r90
  text "C" at 2480,1585 h39.37 r90
  text "D3.3" at 3200,1585 h39.37
  text "C" at 3275,1585 h39.37
  text "C" at 830,1490 h39.37
  text "C" at 120,1470 h39.37
  text "104" at 3855,1460 h39.37
  text "C" at 120,1375 h39.37
  text "F" at 325,1305 h39.37
  text "4.7K" at 3640,1300 h39.37
  text "4.7K" at 3730,1300 h39.37
  text "C" at 830,1255 h39.37
  text "10uH" at 3070,1165 h39.37 r270
  text "104" at 2680,1115 h39.37 r90
  text "104" at 3070,1070 h39.37 r270
  text "C" at 120,1040 h39.37
  text "C" at 835,1015 h39.37
  text "10K" at 3510,995 h39.37
  text "103" at 3070,970 h39.37 r270
  text "104" at 3855,965 h39.37
  text "C" at 120,960 h39.37
  text "10K" at 1755,955 h39.37
  text "104" at 2230,940 h39.37
  text "F" at 345,890 h39.37
  text "0R" at 670,865 h39.37
  text "10uH" at 2235,820 h39.37
  text "4.7K" at 3650,775 h39.37
  text "4.7K" at 3730,775 h39.37
  text "10K" at 2810,770 h39.37 r90
  text "103" at 2230,605 h39.37
  text "D3V3" at 1540,455 h39.37
  text "104" at 3845,455 h39.37
  text "10K" at 3600,350 h39.37 r90
  text "0R" at 1020,195 h39.37 r90
  text "0R" at 3290,150 h39.37
  text "0R" at 1020,90 h39.37 r90
  text "104" at 2165,30 h39.37
  text "10K" at 2255,30 h39.37
Mechanical 15:
  lines w39.37: 1576.3,3189.98 1576.3,2717.54 ; 2363.7,3189.98 2363.7,2717.54 ; -510.32,827.78 4450.31,827.78 ; -510.32,827.78 -470.94,1221.48 ; -510.32,827.78 -510.32,-156.48 4450.31,-156.48 4450.31,827.78 ; -470.94,1221.48 4410.94,1221.48 ; -470.94,1221.48 -352.83,1615.18 ; -352.83,1615.18 4292.83,1615.18 ; -352.83,1615.18 -116.61,2008.88 ; -116.61,2008.88 4056.61,2008.88 ; -116.61,2008.88 99.92,2402.58 ; 99.92,2402.58 3840.08,2402.58 ; 99.92,2402.58 296.77,2914.39 ; 296.77,2914.39 3643.23,2914.39 ; 296.77,2914.39 375.51,3189.98 3564.49,3189.98 3643.23,2914.39 ; 1576.3,2717.54 1576.3,1615.18 2363.7,1615.18 2363.7,2717.54 ; 1576.3,2717.54 2363.7,2717.54 ; 3643.23,2914.39 3840.08,2402.58 ; 3840.08,2402.58 4056.61,2008.88 ; 4056.61,2008.88 4292.83,1615.18 ; 4292.83,1615.18 4410.94,1221.48 ; 4410.94,1221.48 4450.31,827.78

## Text inside footprints (layer, text, board x,y; h text height)
C3: Top Overlay "+" at 425.21,549.07 h78.74
P2: Top Overlay "2" at 3795,539.98 h50 r90; Top Overlay "1" at 3895,559.98 h50 r90
P3: Top Overlay "2" at 3795,1054.98 h50 r90; Top Overlay "1" at 3895,1074.98 h50 r90
P5: Top Overlay "2" at 3795,1569.98 h50 r90; Top Overlay "1" at 3895,1589.98 h50 r90
P13: Top Overlay "2" at 2930,1784.98 h50 r180; Top Overlay "1" at 2910,1884.98 h50 r180; Top Overlay "7" at 2470,1884.98 h50 r180; Top Overlay "8" at 2470,1784.98 h50 r180